# EAGLE board circuit (EAGLE 9.4.2)
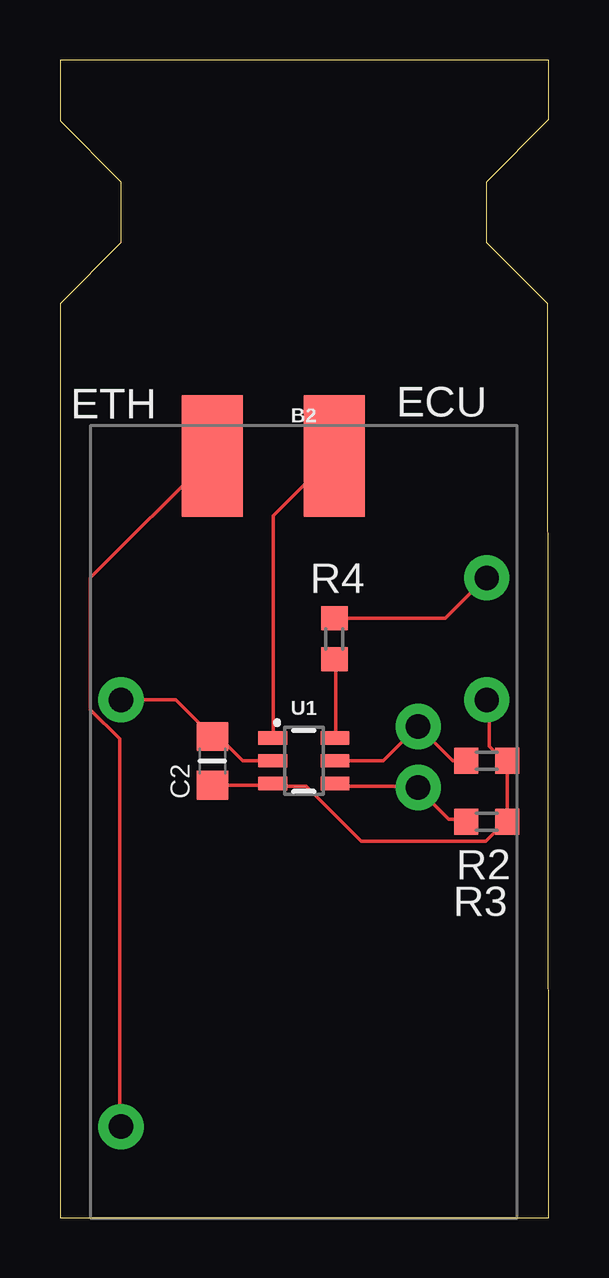
[diagram p0: board, top side]
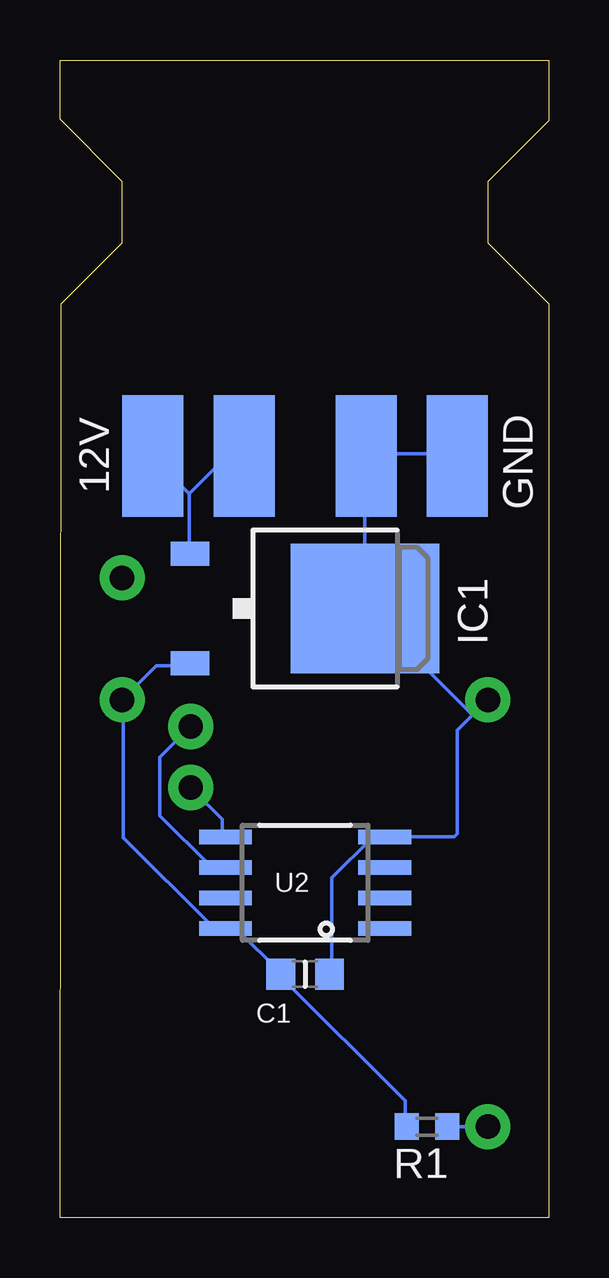
[diagram p1: board, bottom side, seen from below]

Size 20.37 x 48.25 mm. Coordinates in mm from the lower left corner, seen from the top.
Outline: 0,0 20.37,0 20.32,38.1 17.78,40.64 17.78,43.18 20.37,45.77 20.37,48.25 0,48.25 0,45.72 2.54,43.18 2.54,40.64 0,38.1 0,0
Copper layers (1*16): Top 0.035mm / dielectric 1.5mm / Bottom 0.035mm
Design rules "default": minimum track width 6mil, minimum drill 0.35mm, track to track 6mil, track to pad 6mil, pad to pad 6mil, via to via 6mil, smd to smd 6mil, copper to edge 40mil, drill to drill 6mil, minimum pad ring 10mil, minimum via ring 8mil, stop-mask expansion 4mil, vias tented up to drill 0mil, thermal gap 10mil

## Footprints (pad centres in the part's own frame; a part is rotated, then mirrored left to right if it is on the bottom)
SMD2,54-5,08 = smd 2.54 x 5.08: 1 0,0
ARDUINO_PRO_MINI = drill 1.016 pad 1.88: 4 -7.62,5.08; 11 -7.62,-12.7; 21 7.62,5.08; 23 7.62,10.16; A4 4.763,1.429; A5 4.763,3.969
_0805MP = smd 1.2 x 1.3: 1 -1.016,0; 2 1.016,0
TO252 = smd 1 x 1.6: 1 -2.28,-4.8; 2 2.28,-4.8 | smd 5.4 x 6.2: 3 0,2.5
R0603 = smd 1 x 1.1: 1 -0.85,0; 2 0.85,0
SOT23-6 = smd 0.55 x 1.2: 1 0.95,1.3; 2 0,1.3; 3 -0.95,1.3; 4 -0.95,-1.3; 5 0,-1.3; 6 0.95,-1.3
SOIC8_208MIL = smd 0.6 x 2.2: 1 -1.905,-3.315; 2 -0.635,-3.315; 3 0.635,-3.315; 4 1.905,-3.315; 5 1.905,3.315; 6 0.635,3.315; 7 -0.635,3.315; 8 -1.905,3.315

## Placement (x,y rotation side)
12V  WIREPADSMD2,54-5,08  [SMD2,54-5,08]  16.51,31.75 180 bottom
B2  ARDUINO_PRO_MINI_DEPIN  [ARDUINO_PRO_MINI]  10.16,16.51 0 top
C1  10uF  [_0805MP]  10.16,10.16 0 bottom
C2  0.1uF  [_0805MP]  6.35,19.05 90 top
ECU  WIREPADSMD2,54-5,08  [SMD2,54-5,08]  11.43,31.75 180 top
ETH  WIREPADSMD2,54-5,08  [SMD2,54-5,08]  6.35,31.75 0 top
ETH_GND  WIREPADSMD2,54-5,08  [SMD2,54-5,08]  7.62,31.75 180 bottom
ETH_PWR  WIREPADSMD2,54-5,08  [SMD2,54-5,08]  12.7,31.75 180 bottom
GND  WIREPADSMD2,54-5,08  [SMD2,54-5,08]  3.81,31.75 180 bottom
IC1  7805DT  [TO252]  10.16,25.4 270 bottom
R1  4.7k  [R0603]  5.08,3.81 180 bottom
R2  4.7k  [R0603]  17.78,19.05 0 top
R3  4.7k  [R0603]  17.78,16.51 0 top
R4  10k  [R0603]  11.43,24.13 270 top
U1  MCP4725  [SOT23-6]  10.16,19.05 90 top
U2  MB85RC256VPF-G-JNERE2  [SOIC8_208MIL]  10.16,13.97 90 bottom

## Library data of the parts
12V ECU ETH ETH_GND ETH_PWR GND = wirepad
B2 = SparkFun-Boards-revised
C1 C2 U2 = microbuilder
IC1 R1-R4 = adafruit
U1 = SparkFun-IC-Conversion; PROD_ID: IC-08886

## Nets
ETH: B2.11 ETH.1 R1.1
GND: B2.4 B2.23 C1.2 C2.2 ETH_GND.1 GND.1 IC1.3 R4.1 U1.2 U2.4
N$4: R4.2 U1.6
OUT: ECU.1 U1.1
SCL: B2.A5 R2.1 U1.5 U2.6
SDA: B2.A4 R3.1 U1.4 U2.5
VCC: B2.21 C1.1 C2.1 IC1.2 R1.2 R2.2 R3.2 U1.3 U2.8
VIN: 12V.1 ETH_PWR.1 IC1.1

## Tracks (layer width: path | path; a pad name or v marks a point on that pad's centre or on a via)
ETH
  Top 0.152: ETH.1 1.27,26.67 1.27,21.18 2.49,19.96 2.49,3.81 B2.11
  Bottom 0.152: B2.11 R1.1
GND
  Top 0.152: R4.1 11.48,24.99 16.05,24.99 17.73,26.67 B2.23 | B2.4 4.83,21.59 C2.2 6.6,20.07 7.62,19.05 U1.2
  Bottom 0.152: GND.1 3.86,31.85 7.52,31.85 ETH_GND.1 7.67,31.7 7.67,25.45 IC1.3 7.52,25.3 3.25,21.03 3.1,21.03 B2.4 | C1.2 9.04,10.21 9.04,14.17 7.37,15.85 6.91,15.85 U2.4 | 6.76,16 U2.4 | 2.64,21.49 B2.4 | B2.4 3.81,20.32 3.81,16 3.94,15.88 U2.4
N$4
  Top 0.152: R4.2 11.48,23.16 11.48,20.12 U1.6
OUT
  Top 0.152: U1.1 8.89,20.12 8.89,29.26 11.33,31.7 ECU.1
SCL
  Top 0.152: R2.1 16.36,19.05 14.99,20.42 B2.A5 14.83,20.42 13.46,19.05 U1.5
  Bottom 0.152: U2.6 13.61,14.63 14.07,14.63 16.2,16.76 16.2,19.2 14.99,20.42 B2.A5
SDA
  Top 0.152: R3.1 16.82,16.61 16.2,16.61 14.99,17.83 B2.A4 14.83,17.98 11.48,17.98 U1.4
  Bottom 0.152: U2.5 13.61,16 13.61,16.61 14.83,17.83 B2.A4
VCC
  Top 0.152: B2.21 17.88,21.49 17.88,19.66 18.49,19.05 R2.2 18.64,19.05 18.64,16.61 R3.2 18.49,16.46 17.73,15.7 12.55,15.7 10.26,17.98 8.89,17.98 U1.3 8.79,18.03 C2.1
  Bottom 0.152: R1.2 5.99,3.81 5.99,4.88 11.18,10.06 C1.1 11.18,10.21 13.01,12.04 13.46,12.04 U2.8 13.61,12.19 14.07,12.19 17.73,15.85 17.73,21.49 B2.21 16.36,23.01 14.99,23.01 IC1.2
VIN
  Bottom 0.152: 14.99,30.18 14.99,27.74 IC1.1 | 14.99,30.18 16.51,31.7 12V.1 | 14.99,30.18 13.46,31.7 12.7,31.7 ETH_PWR.1